# Altium PCB 102711.PcbDoc
Units mil, origin at the board's own origin, x right, y up, seen from the top; angles counter-clockwise.
Board outline 3500.99 x 3320.09 mil, 2 copper layers (Top Layer, Bottom Layer); 27 components, 30 nets, 90 pads, 33 vias.
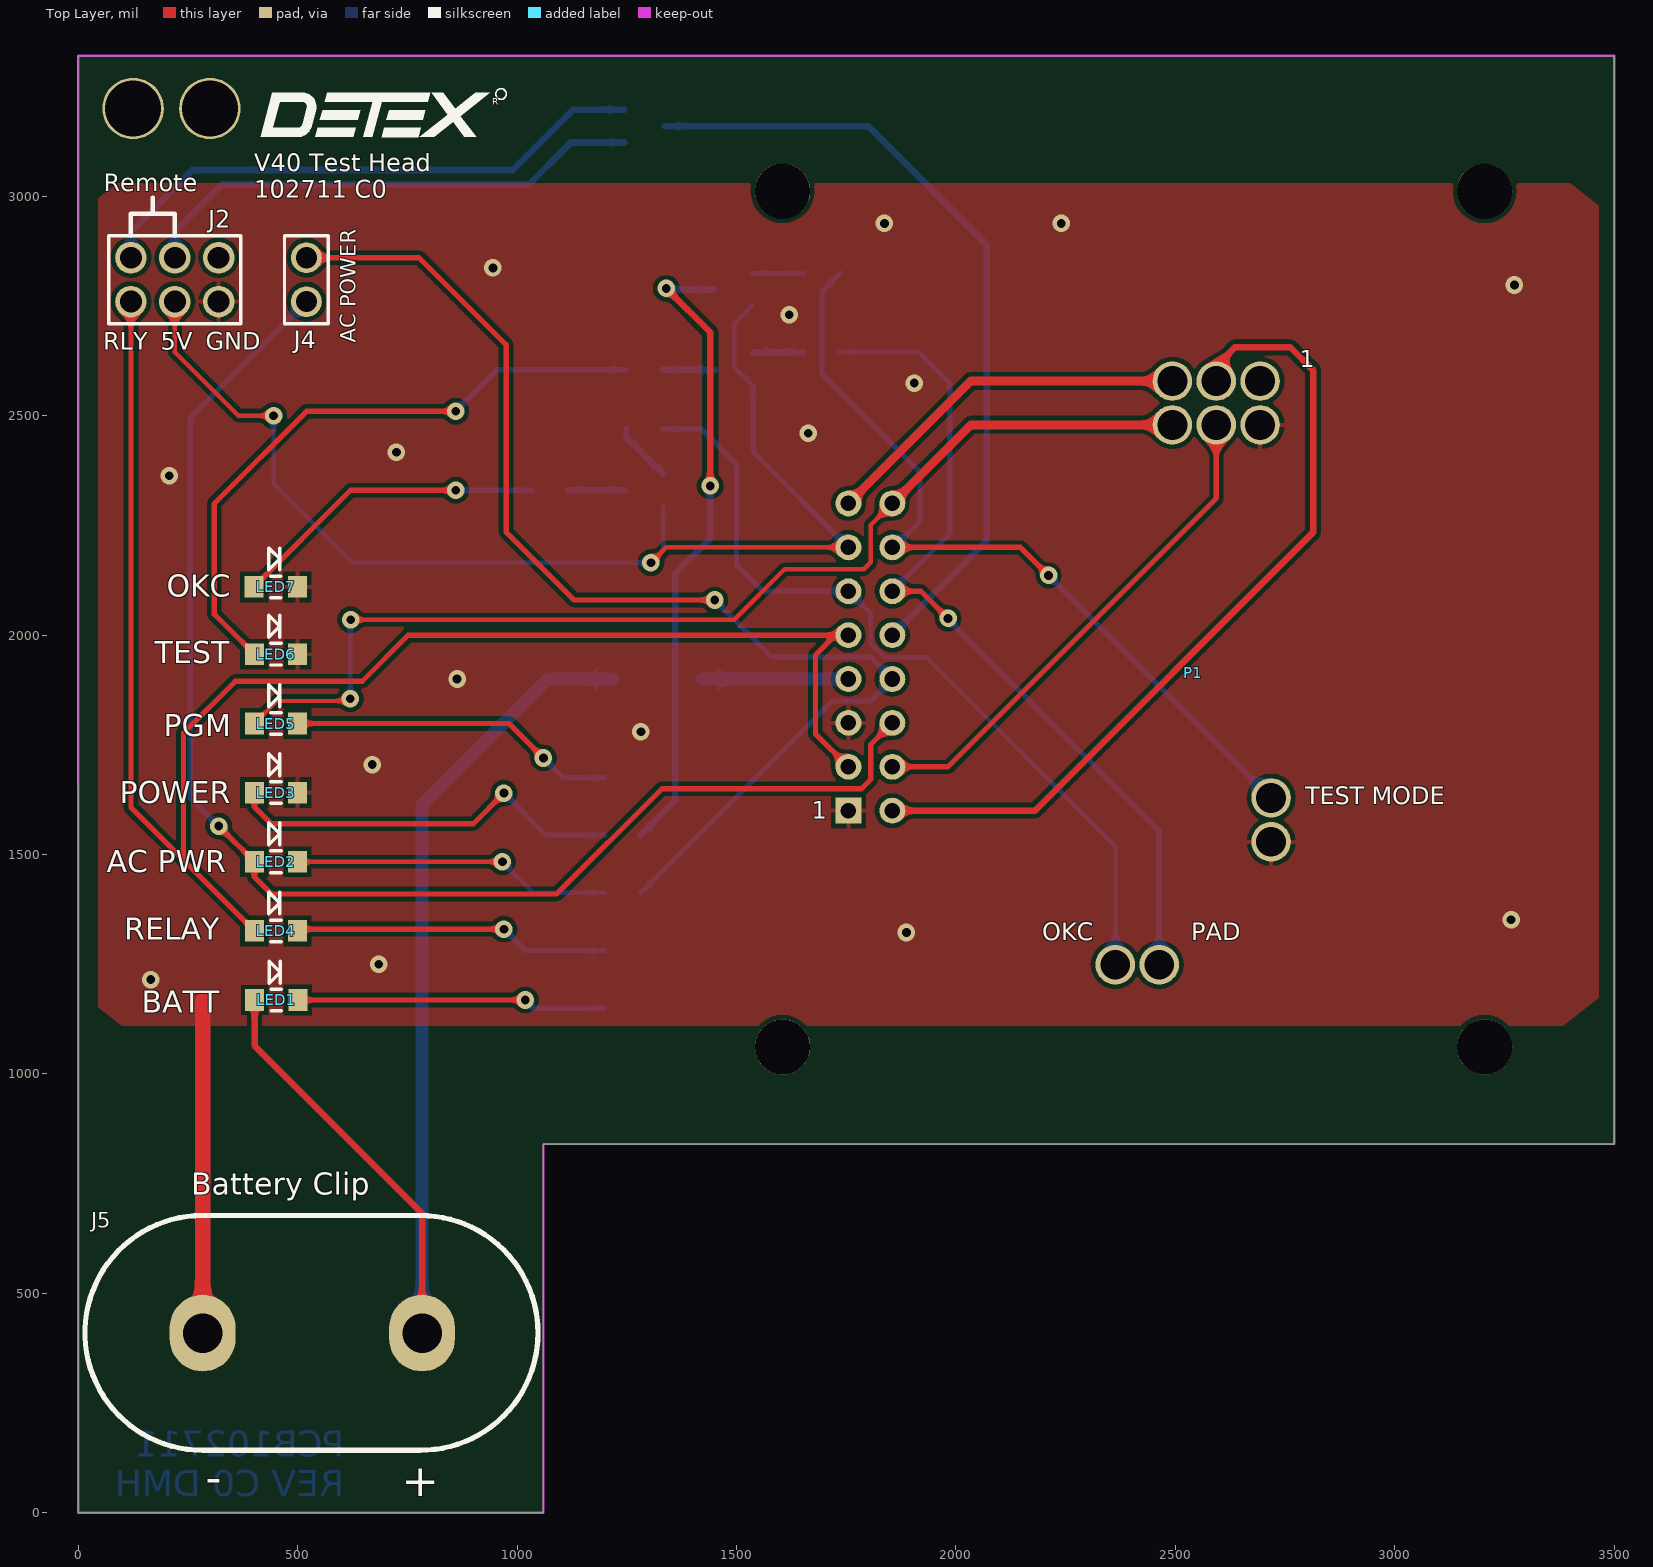
[diagram p0: Top Layer view]
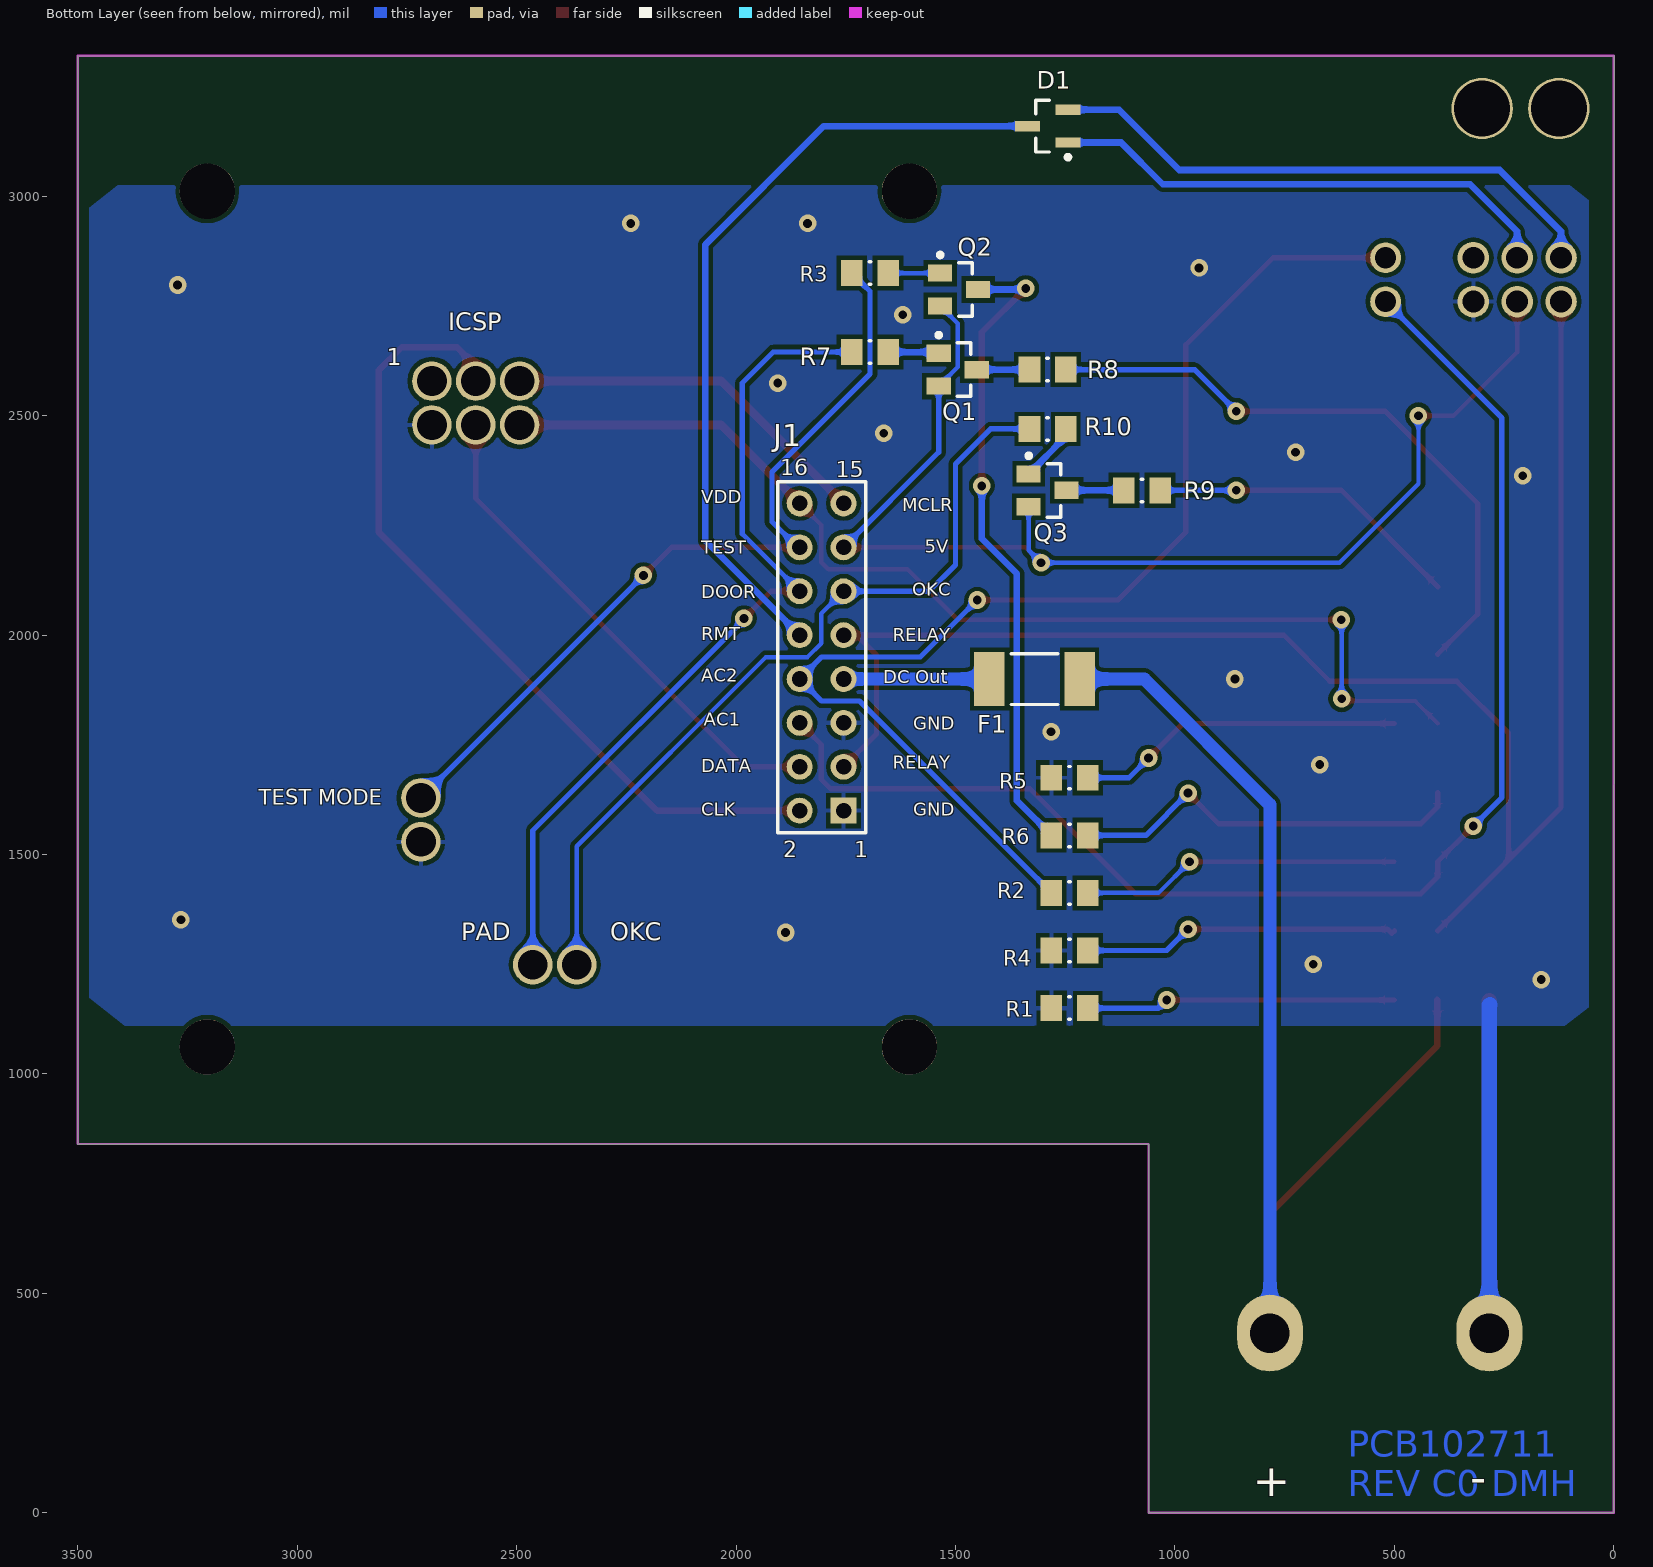
[diagram p1: Bottom Layer view, seen from below]

## Layer stack, top to bottom
Top Solder: solder mask 0.4, Solder Resist, Dk 3.5
Top Layer: signal copper 1.4
Dielectric1: dielectric 12.6, FR-4, Dk 4.8
Bottom Layer: signal copper 1.4
Bottom Solder: solder mask 0.4, Solder Resist, Dk 3.5

## Board outline
0,0 -0.99,3319.44 3500,3320.09 3500,840.16 1059.84,840.16 1059.84,0

## Design rules (kind name [scope] priority, off if disabled: settings)
Clearance Clearance_1 [InPolygon vs (InComponent('ICSP') OR InComponent('OKC_PAD') OR InComponent('TEST'))] p1: gap=20 ignorepadtopadclearanceinfootprint=FALSE except(0: Arc-Hole Track-Hole SMDPad-Hole THPad-Hole Via-Hole Fill-Hole Poly-Hole Region-Hole Text-Hole)
Clearance "Poly Clearance" [InPolygon vs (InComponent('J3') OR InComponent('J4') OR InComponent('J5') OR InComponent('J6') OR InComponent('OKC_PAD') OR InComponent('TEST') OR InComponent('ICSP'))] p2 off: gap=20 ignorepadtopadclearanceinfootprint=FALSE except(0: Arc-Hole Track-Hole SMDPad-Hole THPad-Hole Via-Hole Fill-Hole Poly-Hole Region-Hole Text-Hole)
Clearance "Poly Clearance_1" [InPolygon] p3: gap=10 ignorepadtopadclearanceinfootprint=FALSE except(0: Arc-Hole Track-Hole SMDPad-Hole THPad-Hole Via-Hole Fill-Hole Poly-Hole Region-Hole Text-Hole)
Clearance [All] p4: gap=6 ignorepadtopadclearanceinfootprint=FALSE except(0: Arc-Hole Track-Hole SMDPad-Hole THPad-Hole Via-Hole Fill-Hole Poly-Hole Region-Hole Text-Hole)
HoleSize [All] p1: absolutevalues=TRUE maxlimit=200 minlimit=15 maxpercent=80.000 minpercent=20.000
MinimumSolderMaskSliver [All] p1 off: minsoldermaskwidth=6
PlaneClearance PlaneClearance_1 [(InNet('GND') AND IsTrack OR IsPolygon)] p1: clearance=0
PlaneClearance [All] p2: clearance=20
PolygonConnect PolygonConnect_1 [IsVia vs InNet('GND')] p1: connectstyle=Direct reliefconductorwidth=8 reliefentries=2 polygonreliefangle="90 Angle" airgapwidth=10
PolygonConnect [All] p2: connectstyle=Relief reliefconductorwidth=10 reliefentries=4 polygonreliefangle="90 Angle" airgapwidth=10
RoutingVias [All] p1: holewidth=28 width=50 viastyle="Through Hole" minholewidth=15 minwidth=30 maxholewidth=35 maxwidth=50
SilkToSilkClearance [All] p1: silktosilkclearance=6
SilkToSolderMaskClearance SilkscreenOverComponentPads [IsPad] p1: minsilkscreentomaskgap=10 clearancetoexposedcopper=TRUE
SolderMaskExpansion [All] p1: expansion=4
Width [All] p1: maxlimit=60 minlimit=8 preferedwidth=10
25 further rules are at their usual default settings.

## Components (designator, comment, footprint, x,y, rotation, side; value= is the part's Value field where it differs from the comment)
D1 "BAS70-05" SOT-23_M 1290,3160 r0 bottom
F1 "1812L050PR" LFUS-1812L050_V 1320,1900 r0 bottom
J1 "2x8 Header" HDR2X8 1755,1600 r90 bottom
J2 "2X3 CONN" HDR2X3 120,2760 r0 top
J4 "AC POWER" HDR1X2 520,2760 r90 top
J5 "DC POWER" BAT_CONN 783.47,409.45 r0 top
LED1 "BATT PWR" LTST-C170YKT_V 451.18,1168.58 r0 top
LED2 "AC PWR" LTST-C170YKT_V 450.47,1483.54 r0 top
LED3 "LTST-C170YKT" LTST-C170YKT_V 450.47,1641.02 r0 top
LED4 "LTST-C190GKT" LTST-C170YKT_V 450.47,1326.06 r0 top
LED5 "LTST-C170CKT" LTST-C170YKT_V 450.47,1798.5 r0 top
LED6 "LTST-C170CKT" LTST-C170YKT_V 450.47,1956.5 r0 top
LED7 "LTST-C170CKT" LTST-C170YKT_V 450,2110 r0 top
P1 "V40 POGOS" V40_POGOS 2693.19,2578.98 r0 top locked
Q1 "MMBT3906" FAIR-SOT23-3_V 1495,2605 r180 bottom
Q2 "MMBT3906" FAIR-SOT23-3_V 1491.69,2787.6 r180 bottom
Q3 "MMBT3906" FAIR-SOT23-3_V 1290,2330 r180 bottom
R1 "Res1" RESC0805(2012)_M 1240,1150 r0 bottom value=1K
R2 "Res1" RESC0805(2012)_M 1240,1412.5 r0 bottom value=3.3K
R3 "Res1" RESC0805(2012)_M 1695,2825 r180 bottom value=1K
R4 "Res1" RESC0805(2012)_M 1240,1281.25 r0 bottom value=1K
R5 "Res1" RESC0805(2012)_M 1240,1675 r0 bottom value=1K
R6 "Res1" RESC0805(2012)_M 1240,1543.75 r180 bottom value=1K
R7 "Res1" RESC0805(2012)_M 1695,2645 r180 bottom value=1K
R8 "Res1" RESC0805(2012)_M 1290,2605 r180 bottom value=1K
R9 "Res1" RESC0805(2012)_M 1075,2330 r180 bottom value=1K
R10 "Res1" RESC0805(2012)_M 1290,2470 r180 bottom value=1K

## Footprints (in the part's own frame and the unit in brackets; to place one, negate y for a bottom-side part, rotate by r counter-clockwise, add the part's x,y. Pads: shape width x height; smd on the part's side, far side on the other; paste and mask are expansions set on the pad)
BAT_CONN [mil]
  oval 150x175 hole 90: 1(0,0) 2(-500,0)
  silkscreen extent -768,-267 264,268
FAIR-SOT23-3_V [mm] "SOT23, 3-Leads, Body 3.12x1.5mm, Pitch 0.95mm"
  rect 1.4x1 smd: 1(-1.1,0.95) 2(-1.1,-0.95) 3(1.1,0)
  silkscreen extent -1.23,-1.55 0.75,2.12, body extent -1.35,-1.56 1.35,1.56, height 1.2
HDR1X2 [mil] "Connector; Header; 2 Position"
  round 70 hole 48: 1(0,0) 2(100,0)
  silkscreen extent -50,-50 150,50
HDR2X3 [mil] "Connector; Header; 3x2 Position"
  round 72 hole 50: 1(0,0) 2(0,100) 3(100,0) 4(100,100) 5(200,0) 6(200,100)
  silkscreen extent -50,-50 250,150
HDR2X8 [mm] "Connector; Header; 8x2 Position"
  rect 1.5x1.5 hole 0.9: 1(0,0)
  round 1.5 hole 0.9: 2(0,2.54) 3(2.54,0) 4(2.54,2.54) 5(5.08,0) 6(5.08,2.54) 7(7.62,0) 8(7.62,2.54) 9(10.16,0) 10(10.16,2.54) 11(12.7,0) 12(12.7,2.54) 13(15.24,0) 14(15.24,2.54) 15(17.78,0) 16(17.78,2.54)
  silkscreen extent -1.27,-1.27 19.05,3.81
LFUS-1812L050_V [mm] "Chip Fuse, 2-Leads, Body 4.73x3.41mm"
  rect 1.78x3.15 smd: 1(-2.615,0) 2(2.615,0)
  silkscreen extent -1.35,-1.47 1.35,1.48, body extent -2.36,-1.7 2.36,1.7, height 0.75
LTST-C170YKT_V [mm] "SMD, 2-Leads, Body 2x1.25mm"
  rect 1.1x1.25 smd: 1(-1.25,0) 2(1.25,0)
  silkscreen extent -0.41,-0.63 0.3,2.25, body extent -1,-0.63 1,0.63, height 1.1
RESC0805(2012)_M [mm] "Chip Resistor, Body 2.0x1.3mm, IPC Low Density"
  rect 1.25x1.5 smd: 1(-1.05,0) 2(1.05,0)
  silkscreen extent -0.05,-0.65 0.05,0.65, body extent -1.1,-0.67 1.1,0.67, height 0.7
SOT-23_M [mm] "SOT23, 3-Leads, Body 2.9x1.3mm, Pitch 0.95mm, Lead Span 2.5mm, IPC Low Density"
  rect 1.45x0.6 smd: 1(-1.175,0.95) 2(-1.175,-0.95) 3(1.175,0)
  silkscreen extent -1.3,-1.5 0.7,1.92, body extent -0.7,-1.5 0.7,1.5, height 1.1
V40_POGOS [mil]
  round 90 hole 68: 1(0,0) 2(0,-100) 3(-100,0) 4(-100,-100) 5(-200,0) 6(-200,-100) 7(25,-950) 8(25,-1050) 9(-230,-1330) 10(-330,-1330)

## Part data
D1: library part "D Schottky", "Dual Schottky Diode", MFR="DIODES, INC", ComponentLink1Description=Datasheet, ComponentLink1URL=http://www.mouser.com/ds/2/115/ds11007-768590.pdf, IFmax=70mA, MFR P/N=BAS70-05, PackageReference=SOT23
F1: library part CMP-1700-00002-1, "POLY-FUSE(R) Resettable PTC, 0.5 A, 0.15 to 1 Ohm Resistance, -40 to 85 degC, 1812 (4532 Metric), RoHS, Tape and Reel", Case\Package=0603, Case Code (Metric)=1608, Max Operating Temperature="155 degC", Min Operating Temperature="-55 degC", Package Quantity=1, Power Rating="100 mW", Resistance="150 kohm", Tolerance=1%, Voltage Rating="50 V", Case Code (Imperial)=0603, ComponentLink1Description="Manufacturer URL", ComponentLink1URL=http://www.littelfuse.com/, ComponentLink2Description=Datasheet, ComponentLink2URL=http://www.littelfuse.com/~/media/electronics/datasheets/resettable_ptcs/littelfuse_ptc_1812l_datasheet.pdf.pdf, DatasheetVersion=Feb-16, Height="0.45 mm", Length="1.6 mm", Mount="Surface Mount", PackageDescription="2-Pin Surface Mount Device, Body 4.55 x 3.24 mm", PackageReference=1812, Packaging="Tape and Reel", Pins=2, REACH SVHC="No SVHC", RoHSCompliant=true, Voltage Rating (DC)="50 V", Width="0.8 mm"
J1: library part "2x9 Header", DESC="RIBBON CONN"
J2: library part "Header 3X2", "Header, 3-Pin, Dual row", LatestRevisionDate=17-Jul-2002, LatestRevisionNote="Re-released for DXP Platform.", Publisher="Altium Limited"
J4 J5: library part "Header 2", "Header, 2-Pin", LatestRevisionDate=17-Jul-2002, LatestRevisionNote="Re-released for DXP Platform.", Publisher="Altium Limited"
LED1 LED2: library part LED-ORANGE-AK-2
LED3: library part CMP-1674-00003-5, "LED Uni-Color Yellow, 60 mW, 80 mA, -55 to 85 degC, 2-Pin SMD, RoHS, Tape and Reel", Colour=Yellow, Manufacturer=Lite-On, Max Operating Temperature="85 degC", Min Operating Temperature="-55 degC", Package Quantity=3000, ComponentLink1Description="Manufacturer URL", ComponentLink1URL=http://www.us.liteon.com/, ComponentLink2Description=Datasheet, ComponentLink2URL="http://media.digikey.com/pdf/Data Sheets/Lite-On PDFs/LTST-C170YKT.pdf", DatasheetVersion=03/2000, DESC=TEST, Height="1.1 mm", Length="2 mm", Mount="Surface Mount", Mounting Technology="Surface Mount", PackageDescription="2-Pin Surface Mount Device, Body 2 x 1.25 mm", PackageReference=C170YKT, Packaging="Tape and Reel", Pins=2, RoHSCompliant=true
LED4: library part CMP-1674-00007-1, "LED Uni-Color Green, 100 mW, 5 V, -55 to 85 degC, 2-Pin SMD, RoHS, Tape and Reel", ComponentLink1Description="Manufacturer URL", ComponentLink1URL=http://www.us.liteon.com/, ComponentLink2Description=Datasheet, ComponentLink2URL=http://datasheet.octopart.com/LTST-C190GKT-Lite-On-datasheet-158530.pdf, DatasheetVersion=Dec-06, PackageDescription="2-Pin Surface Mount Device, Body 1.6 x 0.8 mm", PackageReference=C190GKT
LED5 LED6 LED7: library part CMP-1674-00001-5, "LED Uni-Color Red, 100 mW, 200 mA, -55 to 85 degC, 2-Pin SMD, RoHS, Tape and Reel", Colour=Red, Manufacturer=Lite-On, Max Operating Temperature="85 degC", Min Operating Temperature="-55 degC", Package Quantity=3000, ComponentLink1Description="Manufacturer URL", ComponentLink1URL=http://www.us.liteon.com/, ComponentLink2Description=Datasheet, ComponentLink2URL=http://media.digikey.com/pdf/Data%20Sheets/Lite-On%20PDFs/LTST-C170CKT.pdf, DatasheetVersion=03/2003, Height="1.1 mm", Length="2 mm", Mount="Surface Mount", Mounting Technology="Surface Mount", PackageDescription="2-Pin Surface Mount Device, Body 2 x 1.25 mm", PackageReference=C170CKT, Packaging="Tape and Reel", Pins=2, RoHSCompliant=true
  LED5: DESC=PGM
  LED6: DESC=DOOR
  LED7: DESC=OKC
P1: library part V40_POGOS
Q1 Q2 Q3: library part CMP-1670-00011-1, "PNP General-Purpose Amplifier, 40 V, 0.2 A, -55 to 150 degC, 3-Pin SOT23, RoHS, Tape and Reel", Capacitance="1 uF", Case\Package=Radial, Max Operating Temperature="105 degC", Min Operating Temperature="-55 degC", Package Quantity=200, Tolerance=20%, Voltage Rating="50 V", ComponentLink1Description="Manufacturer URL", ComponentLink1URL=https://www.fairchildsemi.com/, ComponentLink2Description=Datasheet, ComponentLink2URL=https://www.fairchildsemi.com/datasheets/MM/MMBT3906.pdf, ComponentLink3Description="Package Specification", ComponentLink3URL=http://www.fairchildsemi.com/dwg/MA/MA03D.pdf, DatasheetVersion="Rev. 1.2.2, 04/2014", Diameter="5 mm", Height="11 mm", Lead Pitch="2 mm", Length="12 mm", Mount="Through Hole", PackageDescription="3-Pin Small Outline Transistor, Body 2.92 x 1.325 mm, Pitch 0.95 mm", PackageReference=SOT23-3, Packaging=Bulk, Pins=2, Radiation Hardening=No, REACH SVHC="No SVHC", RoHSCompliant=true, Voltage Rating (DC)="50 V", Width="0 inch"
R1 R2 R3 R4 R5 R6 R7 R8 R9 R10: "Resistor", LatestRevisionDate=17-Jul-2002, LatestRevisionNote="Re-released for DXP Platform.", PackageDescription="Axial Device, Thru-Hole; 2 Leads; 0.3 in Pin Spacing", PackageReference=AXIAL-0.3, Published=8-Jun-2000, Publisher="Altium Limited"

## Free pads (board coordinates)
  round 140 hole 127: 0(125,3200) 0(300,3200)
  round 126 hole 126 unplated: 0(1605,1061.66) 0(1605,3011.66) 0(3205,1061.66) 0(3205,3011.66)

## Via types
v1: diameter 40, hole 20, Top Layer to Bottom Layer, tented both sides, 33 vias

## Nets (pads, with @x,y where several pads share a name; then routed paths per layer and width w, separated by ;. In a path a pad name is that pad's centre, name@x,y a point inside that pad or via, vN(x,y) a via of type N, cw(c..) or ccw(c..) an arc to the next point about the centre after c; other vN are vias at no path point)
5V: J1.13 J2.3 Q1.2 Q2.2 Q3.2 | length 2767.9
  Top Layer w10: J2.3 220,2645 365,2500 v1(445,2500) ; v1(1305,2165) 1340,2200 J1.13
  Bottom Layer w10: v1(445,2500) 445,2345 625,2165 v1(1305,2165) 1333.31,2193.31 Q3.2 ; Q2.2 1495,2710.2 1495,2610.91 Q1.2
  Bottom Layer w12: Q1.2 1538.31,2416.69 J1.13
AC1: J1.6 J4.1 LED2.1 | length 3159.8
  Top Layer w12: v1(320,1564.8) LED2.1 401.26,1448.74 440,1410 1090,1410 1330,1650 1785,1650 1806,1671 1806,1751 J1.6
  Bottom Layer w12: v1(320,1564.8) 255,1629.8 255,2495 J4.1
AC2: J1.8 J4.2 R2.2 | length 2758.1
  Top Layer w12: J4.2 776.57,2860 975,2661.57 975,2235 1130,2080 v1(1450.39,2080)
  Bottom Layer w12: R2.2 1718.84,1850 1805,1850 J1.8 1805,1950 1580.39,1950 v1(1450.39,2080)
BATT: F1.1 J5.1 LED1.1 | length 2673.4
  Top Layer w15: LED1.1 401.97,1064.02 783.47,682.52 J5.1
  Bottom Layer w30: J5.1 783.47,1613.47 1070,1900 F1.1
CLK: J1.2 P1.3 | length 1885.9
  Top Layer w15: J1.2 2180,1600 2814,2234 2814,2604 2762,2656 2636,2656 2593.19,2613.19 P1.3
DATA: J1.4 P1.4 | length 1159.1
  Top Layer w12: J1.4 1982,1700 2593.19,2311.19 P1.4
DOOR: J1.12 P1.9 R7.1 | length 1948.6
  Top Layer w12: J1.12 1920,2100 v1(1982,2038)
  Bottom Layer w12: R7.1 1915.37,2645 1986,2574.37 1986,2231 J1.12 ; v1(1982,2038) 1982,2036 2463.19,1554.81 P1.9
GND: J1.1 J1.5 J2.5 J5.2 LED3.2 LED6.2 LED7.2 P1.2 P1.8 R1.2 R4.2 R5.2 | length 1506.2
  Top Layer w35: J5.2 283.47,1166.53
  Bottom Layer w35: 282,1158 283.47,1156.53 J5.2
  other v1: 165,1215 685,1250 1887.27,1322.33 3265,1351.4 670,1705 1282.14,1780 863.31,1900 207.38,2363.01 725,2416.69 1663.72,2460 1905,2574.37 1620,2730 3272.77,2797.83 945,2836.8 1837.13,2938.3 2240,2938.3
MCLR: J1.15 P1.5 | length 853.7
  Top Layer w20: J1.15 2033.98,2578.98 P1.5
NetD1_1: D1.1 J2.4 | length 1167.7
  Bottom Layer w15: J2.4 220,2920 327.6,3027.6 1027.6,3027.6 1122.6,3122.6 D1.1
NetD1_2: D1.2 J2.2 | length 1298.6
  Bottom Layer w15: J2.2 120,2920 260,3060 990,3060 1127.4,3197.4 D1.2
NetF1_2: F1.2 J1.7 | length 332
  Bottom Layer w30: F1.2 J1.7
NetLED1_2: LED1.2 R1.1 | length 706
  Top Layer w12: LED1.2 v1(1018.58,1168.58)
  Bottom Layer w12: v1(1018.58,1168.58) 1037.17,1150 R1.1
NetLED2_2: LED2.2 R2.1 | length 728.4
  Top Layer w10: LED2.2 v1(966.46,1483.54)
  Bottom Layer w10: v1(966.46,1483.54) 1037.5,1412.5 R2.1
NetLED3_1: LED3.1 R6.2 | length 914.6
  Top Layer w12: LED3.1 401.26,1608.74 440,1570 900,1570 v1(970,1640)
  Bottom Layer w12: v1(970,1640) 1066.25,1543.75 R6.2
NetLED4_2: LED4.2 R4.1 | length 725.8
  Top Layer w12: LED4.2 505.75,1320 515.75,1330 v1(970,1330)
  Bottom Layer w12: v1(970,1330) 1018.75,1281.25 R4.1
NetLED5_2: LED5.2 R5.1 | length 750.1
  Top Layer w12: LED5.2 981.5,1798.5 v1(1060,1720)
  Bottom Layer w12: v1(1060,1720) 1105,1675 R5.1
NetLED6_1: LED6.1 R8.2 | length 1446.3
  Top Layer w12: LED6.1 310,2047.76 310,2300 520,2510 v1(860,2510)
  Bottom Layer w12: v1(860,2510) 955,2605 R8.2
NetLED7_1: LED7.1 R9.2 | length 724
  Top Layer w12: LED7.1 620.79,2330 v1(860,2330)
  Bottom Layer w12: v1(860,2330) R9.2
NetQ1_1: Q1.1 R7.2 | length 116.4
  Bottom Layer w15: Q1.1 1540.91,2645 R7.2
NetQ1_3: Q1.3 R8.1 | length 120.4
  Bottom Layer w15: R8.1 Q1.3
NetQ2_1: Q2.1 R3.2 | length 118.7
  Bottom Layer w10: Q2.1 R3.2
NetQ2_3: Q2.3 R6.1 | length 1462.8
  Top Layer w15: v1(1340,2790) 1440,2690 v1(1440,2340)
  Bottom Layer w15: R6.1 1360,1622.41 1360,2140 1440,2220 v1(1440,2340) ; v1(1340,2790) 1342.4,2787.6 Q2.3
NetQ3_1: Q3.1 R10.2 | length 137.7
  Bottom Layer w12: R10.2@1248.66,2452.05 R10.2
  Bottom Layer w15: R10.2@1248.66,2452.05 Q3.1
NetQ3_3: Q3.3 R9.1 | length 130.4
  Bottom Layer w15: R9.1 Q3.3
OKC: J1.11 P1.10 R10.1 | length 1870.2
  Bottom Layer w10: J1.11 1806,2049 1806,1981.13 1837.13,1950 1932,1950 2363.19,1518.81 P1.10
  Bottom Layer w12: R10.1 1420,2470 1500,2390 1500,2160 1560,2100 J1.11
RELAY_COM: J1.3 J1.9 J2.1 LED4.1 | length 3827.1
  Top Layer w12: J2.1 120,1607.32 240,1487.32 ; LED4.1 240,1487.32 ; J1.3 1680,1775 1680,1954.69 1725.31,2000 J1.9 752.04,2000 647.04,1895 357.91,1895 240,1777.09 240,1487.32
RMT: D1.3 J1.10 | length 1824.6
  Bottom Layer w15: D1.3 1800,3160 2070,2890 2070,2215 J1.10
TEST: J1.14 P1.7 R3.1 | length 1863.4
  Top Layer w12: J1.14 2147.17,2200 v1(2211.17,2136)
  Bottom Layer w12: R3.1 1695,2783.66 1695,2595 1918.23,2371.77 1918.23,2258.23 1860,2200 J1.14 ; v1(2211.17,2136) P1.7
VDD: J1.16 LED5.1 P1.6 | length 2528.6
  Top Layer w10: LED5.1 452.76,1850 615,1850 v1(620,1855) ; v1(620.79,2035) 1494.59,2035 1609.59,2150 1790,2150 1806,2166 1806,2251 J1.16
  Top Layer w20: J1.16 2033.98,2478.98 P1.6
  Bottom Layer w10: v1(620,1855) 620,2034.21 v1(620.79,2035)
pads on no net: J2.6 P1.1

## Polygon pours and split planes (outlines as drawn)
GND on Top Layer "GND_L01_P004" (solid, remove dead copper, pour order 4): 45,2995.94 88.43,3030 3399.86,3030 3465,2978.91 3465,1173.86 3383.57,1110 99.29,1110 45,1152.57
GND on Bottom Layer "Top Layer-No Net" (solid, remove dead copper, pour order 3): 57,2991.03 100.39,3025 3408.91,3025 3474,2974.05 3474,1173.69 3392.64,1110 111.24,1110 57,1152.46

## Keep-outs
Keep-Out Layer:
  lines w5: 0,0 0,3320.09 3500,3320.09 3500,840.16 1059.84,840.16 1059.84,0 0,0

## Other copper
Bottom Layer:
  text "PCB102711 / REV C0 DMH" at 606.57,38.04 h60

## Silkscreen, mask and mechanical layers (free items; w line width, h text height)
Top Overlay:
  circle w4: c963.31,3233.12 r12
  region: 464.38,3235.88 437.38,3135.12 415.62,3135.12 442.62,3235.88
  region: 459.38,3235.88 511.12,3235.88 514.12,3235.62 516.62,3235.38 519.88,3234.62 522.62,3233.62 525.88,3232.12 528.62,3230.38 531.88,3228.12 534.38,3225.38 536.38,3223.12 538.62,3219.62 540.38,3215.62 541.62,3211.38 542.38,3207.12 542.12,3202.38 541.88,3198.88 530.38,3156.62 529.38,3153.88 527.88,3151.12 525.88,3147.62 523.38,3144.62 520.38,3142.12 517.88,3140.12 515.62,3138.62 512.88,3137.62 509.12,3136.12 504.88,3135.38 502.62,3135.12 435.88,3135.12 443.12,3156.12 502.12,3156.12 504.62,3156.62 505.62,3157.12 507.12,3158.12 508.38,3159.38 509.38,3160.62 510.38,3162.62 511.12,3165.12 521.38,3206.62 521.12,3207.88 520.62,3208.88 519.88,3210.12 518.38,3211.62 517.38,3212.88 514.62,3214.38 513.12,3214.88 511.12,3215.12 458.88,3214.88
  region: 545.88,3156.12 632.12,3156.12 626.38,3135.12 540.12,3135.12
  region: 556.62,3195.88 642.88,3195.88 637.12,3174.88 550.88,3174.88
  region: 708.12,3195.88 790.88,3195.88 785.38,3174.88 702.38,3174.88
  region: 697.38,3156.12 780.38,3155.88 774.62,3134.88 691.62,3134.88
  region: 831.38,3235.88 858.62,3199.12 904.62,3235.88 938.12,3235.88 870.88,3182.38 906.38,3135.12 880.12,3135.12 854.62,3169.38 811.62,3135.12 778.12,3135.12 842.12,3186.12 805.12,3235.88
  region: 801.62,3235.88 796.12,3214.88 691.62,3214.88 670.12,3135.12 649.38,3135.12 670.62,3214.88 561.62,3214.88 567.12,3235.88
  lines w10: 120,2910 120,2960 220,2960 220,2910 ; 170,2960 170,2997.35
  text "R" at 943.31,3203.12 h25
  text "Remote" at 58,3012 h40
  text "V40 Test Head / 102711 C0" at 401.31,2996.94 h40
  text "AC POWER" at 632.12,2666.42 h35 r90
  text "RLY" at 57,2650 h40
  text "5V" at 187.91,2650 h40
  text "GND" at 290,2650 h40
  text "OKC" at 202,2088 h50
  text "TEST" at 174,1936 h50
  text "PGM" at 195,1770 h50
  text "POWER" at 95,1616.42 h50
  text "1" at 1671,1582 h40
  text "AC PWR" at 65,1460 h50
  text "RELAY" at 105,1306.38 h50
  text "BATT" at 145,1140.04 h50
Bottom Overlay:
  text "VDD" at 2079,2300 h30
  text "MCLR" at 1621.72,2282 h30
  text "5V" at 1569.59,2188 h30
  text "TEST" at 2079,2186 h30
  text "OKC" at 1598.01,2090 h30
  text "DOOR" at 2079,2084 h30
  text "RMT" at 2079,1988 h30
  text "RELAY" at 1643.43,1986 h30
  text "AC2" at 2079,1894 h30
  text "DC Out" at 1665,1890 h30
  text "AC1" at 2074,1794 h30
  text "GND" at 1596.59,1784 h30
  text "RELAY" at 1643.43,1696 h30
  text "DATA" at 2079,1688 h30
  text "GND" at 1596.59,1588 h30
  text "CLK" at 2079,1588 h30
Mechanical 1:
  lines w5: 0,0 0,3320.09 3500,3320.09 3500,840.16 1059.84,840.16 1059.84,0 0,0
Drill Drawing:
  circle w10: c4620.93,3670.28 r54.8
  lines w10: 4566.13,2163.31 4593.53,2163.31 4620.93,2135.91 4648.33,2163.31 4675.72,2163.31 4648.33,2190.71 4675.72,2218.11 4648.33,2218.11 4620.93,2245.51 4593.53,2218.11 4566.13,2218.11 4593.53,2190.71 4566.13,2163.31 ; 4566.13,2382.5 4675.72,2382.5 4675.72,2492.1 4566.13,2492.1 4566.13,2382.5 ; 4566.13,2629.1 4675.72,2629.1 4675.72,2738.7 4566.13,2738.7 4566.13,2629.1 ; 4566.13,2875.69 4620.93,2903.09 4675.72,2875.69 4648.33,2930.49 4675.72,2985.29 4620.93,2957.89 4566.13,2985.29 4593.53,2930.49 4566.13,2875.69 ; 4566.13,3231.89 4675.72,3231.89 4620.93,3122.29 4566.13,3231.89 ; 4566.13,3396.28 4593.53,3396.28 4593.53,3368.88 4648.33,3368.88 4648.33,3396.28 4675.72,3396.28 4675.72,3451.08 4648.33,3451.08 4648.33,3478.48 4593.53,3478.48 4593.53,3451.08 4566.13,3451.08 4566.13,3396.28 ; 4566.13,3971.67 4675.72,3971.67 4620.93,3862.07 4566.13,3971.67 ; 4588.05,2651.02 4653.81,2651.02 4653.81,2716.78 4588.05,2716.78 4588.05,2651.02 ; 4588.05,3949.75 4653.81,3949.75 4620.93,3883.99 4588.05,3949.75
  lines w15: 4469.84,2061.93 11126.47,2061.93 ; 4469.84,4034.69 11126.47,4034.69 ; 5354.86,1815.34 5354.86,4281.29 ; 6229.49,1815.34 6229.49,4281.29 ; 8106.63,1815.34 8106.63,4281.29 ; 8917.66,1815.34 8917.66,4281.29 ; 10103.4,1815.34 10103.4,4281.29 ; -0.99,3320 -0.06,0 1060,0 1060,840 1530,840 1777.49,840 3500,840 3500,3320 1200.97,3320 -0.99,3320 ; 4469.84,1815.34 11126.47,1815.34 11126.47,4281.29 4469.84,4281.29 4469.84,1815.34
  text "Symbol" at 4617.8,4108.67 h118.37
  text "Count" at 5428.84,4108.67 h118.37
  text "Hole Size" at 6303.47,4108.67 h118.37
  text "Plated" at 8180.6,4108.67 h118.37
  text "Hole Type" at 8991.64,4108.67 h118.37
  text "Via/Pad" at 10177.38,4108.67 h118.37
  text "2" at 5428.84,3862.07 h98.64
  text "48.00mil (1.219mm)" at 6303.47,3862.07 h98.64
  text "PTH" at 8180.6,3862.07 h98.64
  text "Round" at 8991.64,3862.07 h98.64
  text "Pad" at 10177.38,3862.07 h98.64
  text "2" at 5428.84,3615.48 h98.64
  text "90.00mil (2.286mm)" at 6303.47,3615.48 h98.64
  text "PTH" at 8180.6,3615.48 h98.64
  text "Round" at 8991.64,3615.48 h98.64
  text "Pad" at 10177.38,3615.48 h98.64
  text "2" at 5428.84,3368.88 h98.64
  text "127.00mil (3.226mm)" at 6303.47,3368.88 h98.64
  text "PTH" at 8180.6,3368.88 h98.64
  text "Round" at 8991.64,3368.88 h98.64
  text "Pad" at 10177.38,3368.88 h98.64
  text "4" at 5428.84,3122.29 h98.64
  text "126.00mil (3.200mm)" at 6303.47,3122.29 h98.64
  text "NPTH" at 8180.6,3122.29 h98.64
  text "Round" at 8991.64,3122.29 h98.64
  text "Pad" at 10177.38,3122.29 h98.64
  text "6" at 5428.84,2875.69 h98.64
  text "50.00mil (1.270mm)" at 6303.47,2875.69 h98.64
  text "PTH" at 8180.6,2875.69 h98.64
  text "Round" at 8991.64,2875.69 h98.64
  text "Pad" at 10177.38,2875.69 h98.64
  text "10" at 5428.84,2629.1 h98.64
  text "68.00mil (1.727mm)" at 6303.47,2629.1 h98.64
  text "PTH" at 8180.6,2629.1 h98.64
  text "Round" at 8991.64,2629.1 h98.64
  text "Pad" at 10177.38,2629.1 h98.64
  text "16" at 5428.84,2382.5 h98.64
  text "35.43mil (0.900mm)" at 6303.47,2382.5 h98.64
  text "PTH" at 8180.6,2382.5 h98.64
  text "Round" at 8991.64,2382.5 h98.64
  text "Pad" at 10177.38,2382.5 h98.64
  text "33" at 5428.84,2135.91 h98.64
  text "20.00mil (0.508mm)" at 6303.47,2135.91 h98.64
  text "PTH" at 8180.6,2135.91 h98.64
  text "Round" at 8991.64,2135.91 h98.64
  text "Via" at 10177.38,2135.91 h98.64
  text "75 Total" at 5428.84,1889.31 h98.64
  text "Daniel Hahaj - (830) 629-2900 x4370 / Detex Corp / P/N 102711 / GREEN MASK/WHITE SILK, BOTH SIDES / TWO-SIDED COPPER / FR4 0.063\" / LEAD FREE - ROHS" at 4500,-75 h125

## Dimensions
3500,840 to 3500,3320 on Drill Drawing
-0.99,3320 to 3500,3320 on Drill Drawing
0,0 to -0.99,3320 on Drill Drawing
0,0 to 1060,0 on Drill Drawing

## Text inside footprints (layer, text, board x,y; h text height)
J1: Bottom Overlay "2" at 1893,1494 h37; Bottom Overlay "1" at 1731,1494 h37; Bottom Overlay "15" at 1773,2360 h37; Bottom Overlay "16" at 1899,2364 h37
J5: Top Overlay "+" at 822.47,100.45 h75 r180; Top Overlay "-" at 327.47,100.45 h75 r180; Top Overlay "Battery Clip" at 257.97,724.45 h50; Bottom Overlay "-" at 327.47,100.45 h75 r180; Bottom Overlay "+" at 822.47,100.45 h75 r180
P1: Top Overlay "TEST MODE" at 2796.19,1614.48 h40; Top Overlay "1" at 2783.19,2610.48 h39.37; Top Overlay "PAD" at 2536.19,1304.48 h40; Top Overlay "OKC" at 2196.19,1304.48 h40; Bottom Overlay "1" at 2796.19,2614.48 h39.37; Bottom Overlay "TEST MODE" at 3088.19,1613.98 h35; Bottom Overlay "ICSP" at 2656.19,2694.48 h40; Bottom Overlay "OKC" at 2286.19,1304.48 h40; Bottom Overlay "PAD" at 2626.19,1304.48 h40